# EAGLE board io-board-b-f (EAGLE 8.4.3), part 1 of 2
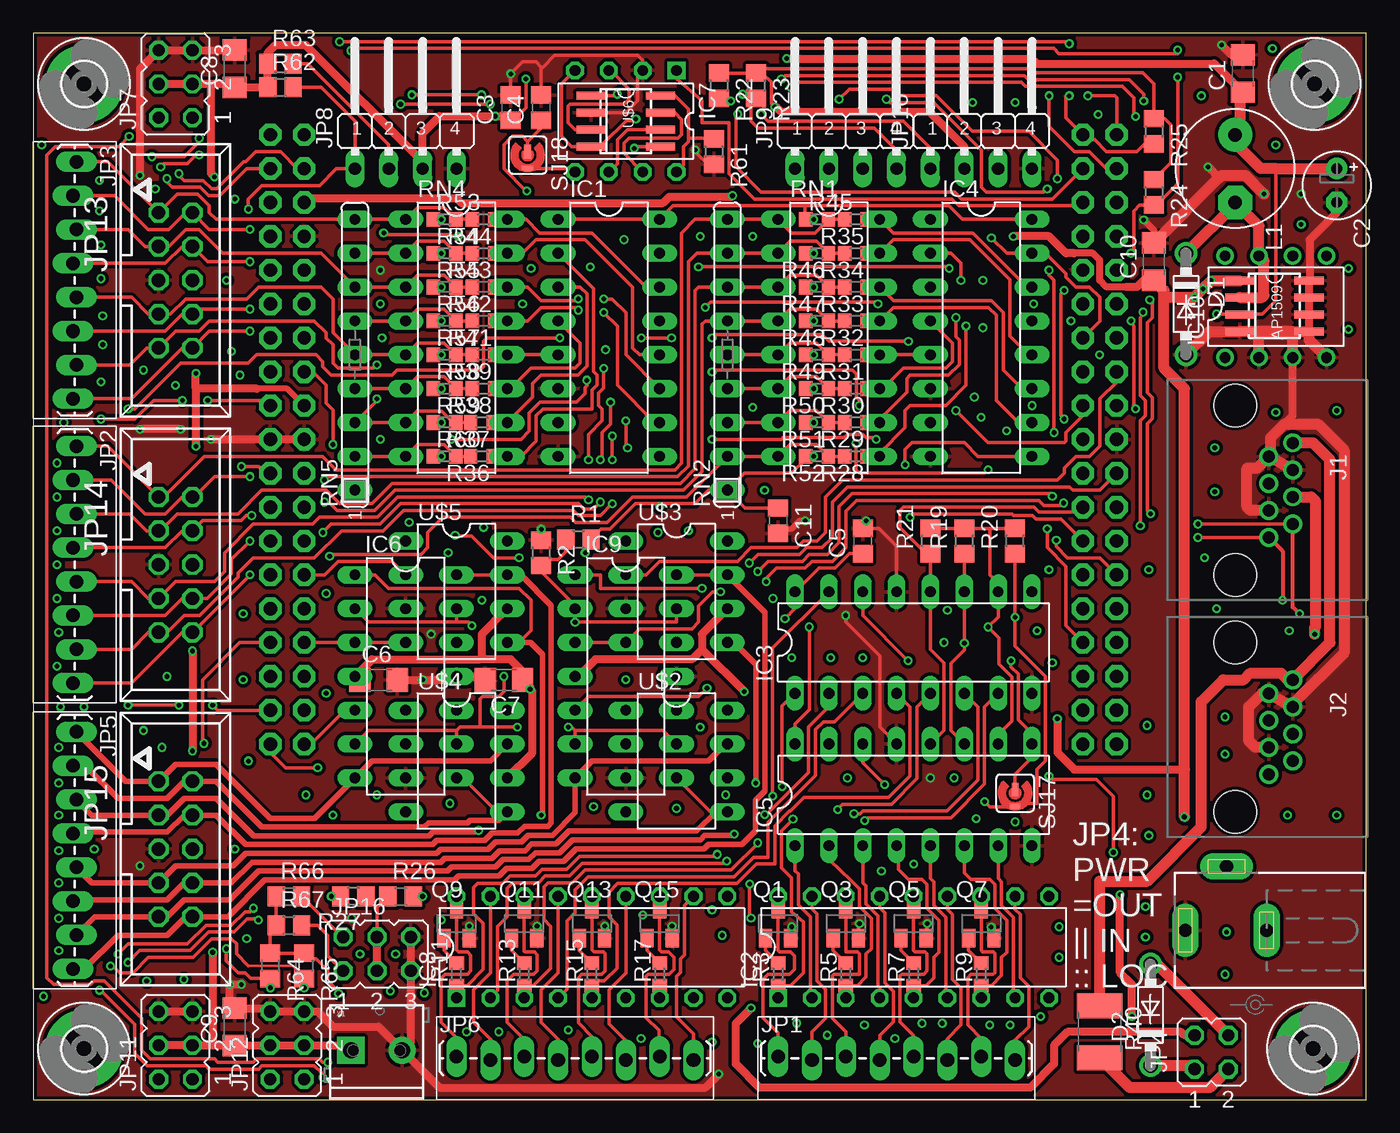
[diagram p0: board, top side]
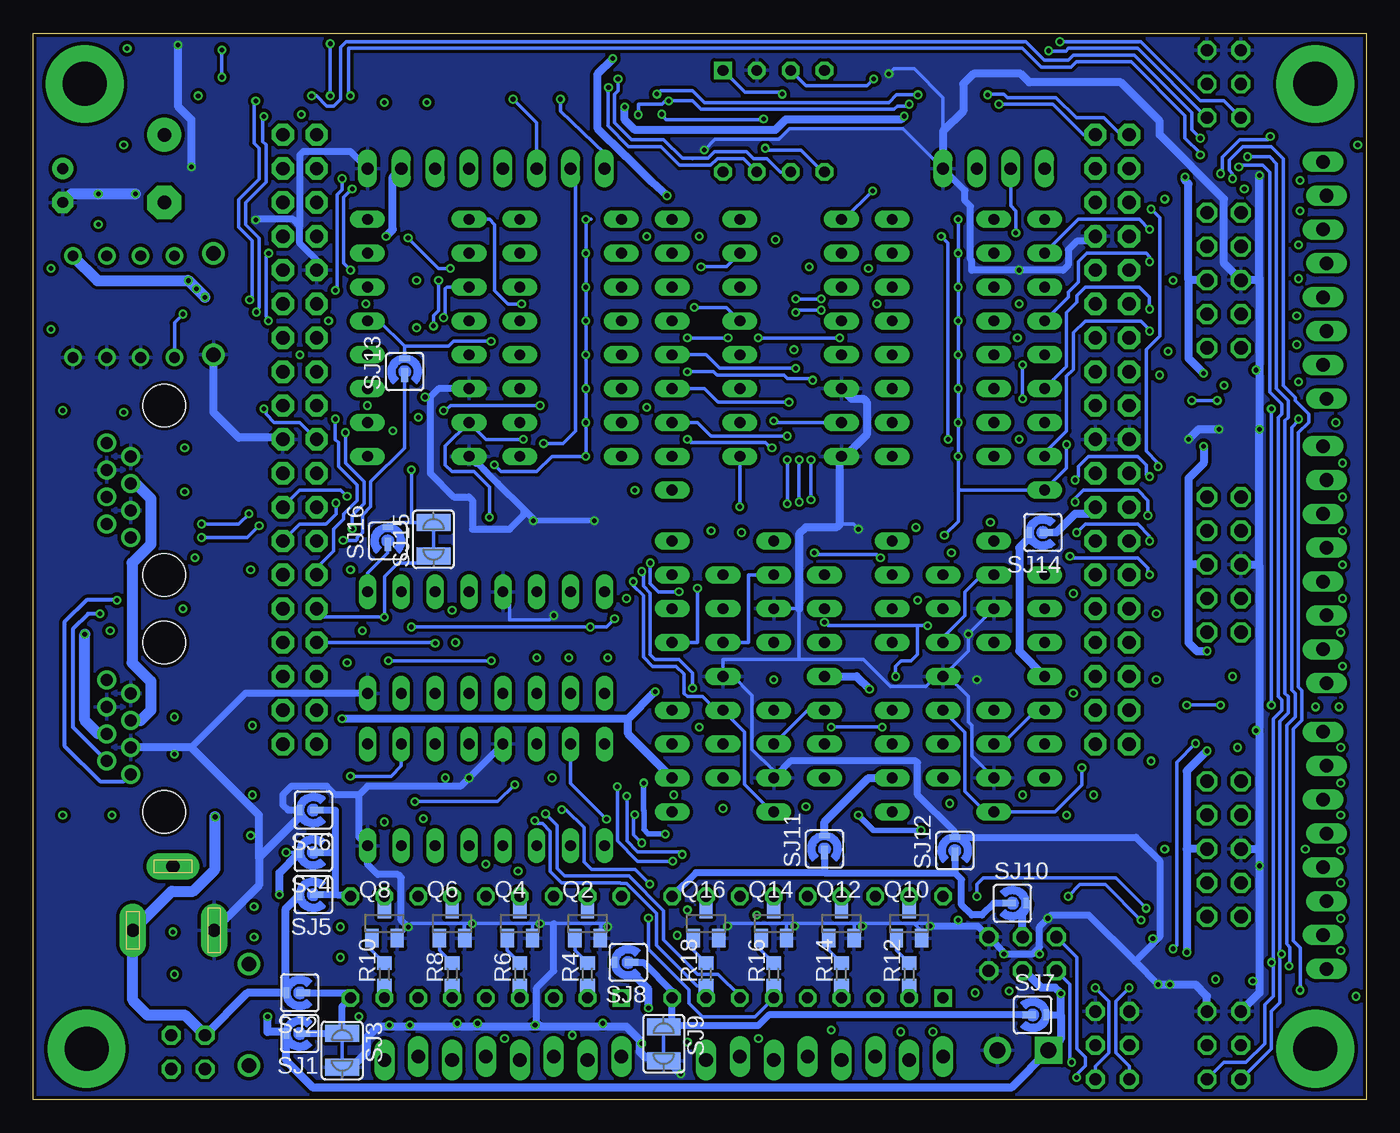
[diagram p1: board, bottom side, seen from below]

Size 100 x 80 mm. Coordinates in mm from the lower left corner, seen from the top.
Outline: 0,0 100,0 100,80 0,80 0,0
Copper layers (1*16): Top 0.035mm / dielectric 1.5mm / Bottom 0.035mm
Design rules "SeeedStudio_2layer_DRU_no_angle_20140221 *": minimum track width 6mil, minimum drill 12mil, track to track 10mil, track to pad 7mil, pad to pad 16mil, via to via 6mil, smd to smd 0mil, copper to edge 10mil, drill to drill 10mil, minimum pad ring 10mil, minimum via ring 6mil, stop-mask expansion 2mil, vias tented up to drill 100mil, thermal gap 10mil

## Footprints (pad centres in the part's own frame; a part is rotated, then mirrored left to right if it is on the bottom)
SO-08 = smd 0.6 x 2.2: 1 -1.905,-2.6; 2 -0.635,-2.6; 3 0.635,-2.6; 4 1.905,-2.6; 5 1.905,2.6; 6 0.635,2.6; 7 -0.635,2.6; 8 -1.905,2.6
C1206 = smd 1.6 x 1.8: 1 -1.4,0; 2 1.4,0
E2,5-5 = drill 0.813 pad 1.6: + -1.27,0 | drill 0.813 pad 1.6 octagon: - 1.27,0
C0805 = smd 1.3 x 1.5: 1 -0.95,0; 2 0.95,0
DO41-7.6 = drill 1.1 pad 1.7: A 3.81,0; C -3.81,0
3,3-PAD = drill 3.3 pad 5.842: B3,3 0,0
DIL16 = drill 0.813 long: 1 -8.89,-3.81; 2 -6.35,-3.81; 3 -3.81,-3.81; 4 -1.27,-3.81; 5 1.27,-3.81; 6 3.81,-3.81; 7 6.35,-3.81; 8 8.89,-3.81; 9 8.89,3.81; 10 6.35,3.81; 11 3.81,3.81; 12 1.27,3.81; 13 -1.27,3.81; 14 -3.81,3.81; 15 -6.35,3.81; 16 -8.89,3.81
DIL18-THIN = drill 0.813 square: 1 -10.16,-3.81 | drill 0.813 octagon: 2 -7.62,-3.81; 3 -5.08,-3.81; 4 -2.54,-3.81; 5 0,-3.81; 6 2.54,-3.81; 7 5.08,-3.81; 8 7.62,-3.81; 9 10.16,-3.81; 10 10.16,3.81; 11 7.62,3.81; 12 5.08,3.81; 13 2.54,3.81; 14 0,3.81; 15 -2.54,3.81; 16 -5.08,3.81; 17 -7.62,3.81; 18 -10.16,3.81
DIL14 = drill 0.813 long: 1 -7.62,-3.81; 2 -5.08,-3.81; 3 -2.54,-3.81; 4 0,-3.81; 5 2.54,-3.81; 6 5.08,-3.81; 7 7.62,-3.81; 8 7.62,3.81; 9 5.08,3.81; 10 2.54,3.81; 11 0,3.81; 12 -2.54,3.81; 13 -5.08,3.81; 14 -7.62,3.81
DIL08 = drill 0.813 square: 1 -3.81,-3.81 | drill 0.813 octagon: 2 -1.27,-3.81; 3 1.27,-3.81; 4 3.81,-3.81; 5 3.81,3.81; 6 1.27,3.81; 7 -1.27,3.81; 8 -3.81,3.81
DIL08' = drill 0.813 pad 1.27: 1 -3.81,-3.81; 2 -1.27,-3.81; 3 1.27,-3.81; 4 3.81,-3.81; 5 3.81,3.81; 6 1.27,3.81; 7 -1.27,3.81; 8 -3.81,3.81
RJ45-PULSE-E5J88 = drill 0.9 pad 1.422: 1 3.555,2.54; 2 2.535,4.32; 3 1.515,2.54; 4 0.495,4.32; 5 -0.495,2.54; 6 -1.515,4.32; 7 -2.535,2.54; 8 -3.555,4.32 | hole 3.2: 6.35,0; -6.35,0
DCJ0202 = drill 1 pad 2 long: 1 0,3.1; 2 4.8,0; 3 0,-3
1X08_TERMINAL = drill 1.016 long: 1 0,0.127; 2 2.54,-0.127; 3 5.08,0.127; 4 7.62,-0.127; 5 10.16,0.127; 6 12.7,-0.127; 7 15.24,0.127; 8 17.78,-0.127
JP2Q = drill 0.914 octagon: 1 -1.27,-1.27; 2 -1.27,1.27; 3 1.27,-1.27; 4 1.27,1.27
JP3Q = drill 0.914 octagon: 1 -2.54,-1.27; 2 -2.54,1.27; 3 0,-1.27; 4 0,1.27; 5 2.54,-1.27; 6 2.54,1.27
JP4F = drill 0.914 long: 1 -2.54,-1.27; 2 0,-1.27; 3 2.54,-1.27; 4 5.08,-1.27
CON10M = drill 1 octagon: 1 -5.08,-1.27; 2 -5.08,1.27; 3 -2.54,-1.27; 4 -2.54,1.27; 5 0,-1.27; 6 0,1.27; 7 2.54,-1.27; 8 2.54,1.27; 9 5.08,-1.27; 10 5.08,1.27
L5-8,5 = drill 1.016 pad 2.54: 1 -2.54,0 | drill 1.016 pad 2.54 octagon: 2 2.54,0
SOT23 = smd 1 x 1.4: 1 -0.95,-1.1; 2 0.95,-1.1; 3 0,1.1
R0805 = smd 1.3 x 1.5: 1 -0.95,0; 2 0.95,0
R0603 = smd 1 x 1.1: 1 -0.85,0; 2 0.85,0
PTC1812 = smd 1.9 x 3.4: 1 -1.95,0; 2 1.95,0
SIL9 = drill 0.813 long: 1 -10.16,0; 2 -7.62,0; 3 -5.08,0; 4 -2.54,0; 5 0,0; 6 2.54,0; 7 5.08,0; 8 7.62,0; 9 10.16,0
SJ_RND2 = smd 1.016 x 0.508: P$1 -0.254,0 | smd 0.406 x 0.813: P$2 1.016,0
SJW-C = smd 1.27 x 2.54: 1 -1.27,0; 2 1.27,0
NUCLEO_BRD_BASE64 = drill 1 pad 1.676 octagon: 3V3 2.54,27.94; 5V2 2.54,25.4; AGND 63.5,7.62; AVDD 60.96,38.1; BOOT0 0,38.1; E5V 2.54,40.64; GND3 0,22.86; GND4 2.54,20.32; GND5 2.54,22.86; GND6 2.54,38.1; GND7 60.96,35.56; GND8 63.5,22.86; IOREF2 2.54,33.02; NC1-PF7 0,33.02; NC2-PF6 0,35.56; NC3 2.54,15.24; NC4 2.54,35.56; NC5-PD8 63.5,35.56; NC6-PB11 63.5,25.4; NC7-PF5 63.5,2.54; NC8-PF4 63.5,0; NRESET 2.54,30.48; PA0 2.54,12.7; PA1 2.54,10.16; PA2 60.96,2.54; PA3 60.96,0; PA4 2.54,7.62; PA5 60.96,33.02; PA6 60.96,30.48; PA7 60.96,27.94; PA8 60.96,17.78; PA9 60.96,20.32; PA10 60.96,5.08; PA11 63.5,30.48; PA12 63.5,33.02; PA13 0,30.48; PA14 0,27.94; PA15 0,25.4; PB0 2.54,5.08; PB1 63.5,17.78; PB2 63.5,20.32; PB3 60.96,7.62; PB4 60.96,12.7; PB5 60.96,10.16; PB6 60.96,25.4; PB7 0,20.32; PB8 60.96,43.18; PB9 60.96,40.64; PB10 60.96,15.24; PB12 63.5,27.94; PB13 63.5,10.16; PB14 63.5,12.7; PB15 63.5,15.24; PC0 2.54,0; PC1 2.54,2.54; PC2 0,2.54; PC3 0,0; PC4 63.5,5.08; PC5 63.5,40.64; PC6 63.5,43.18; PC7 60.96,22.86; PC8 63.5,45.72; PC9 60.96,45.72; PC10 0,45.72; PC11 2.54,45.72; PC12 0,43.18; PC13 0,17.78; PC14 0,15.24; PC15 0,12.7; PD2 2.54,43.18; PF0-PH0 0,10.16; PF1-PH1 0,7.62; U5V 63.5,38.1; VBAT 0,5.08; VDD 0,40.64; VIN2 2.54,17.78
DIL08-LONG = drill 0.813 long: 1 -3.81,-3.81; 2 -1.27,-3.81; 3 1.27,-3.81; 4 3.81,-3.81; 5 3.81,3.81; 6 1.27,3.81; 7 -1.27,3.81; 8 -3.81,3.81
SCREWTERMINAL-3.5MM-2_LOCK = drill 1.2 pad 2.032 square: 1 -0.178,0 | drill 1.2 pad 2.032: 2 3.678,0

## Placement (x,y rotation side)
+12V  9-15V  [POWER_USAGE]  91.69,7.11 270 top
AP1509  AP1509  [SO-08]  93.12,59.54 270 top
C1  [C1206]  90.73,76.99 90 top
C2  [E2,5-5]  97.79,68.58 270 top
C3  [C0805]  35.81,74.42 90 top
C4  [C0805]  38.1,74.42 90 top
C5  [C0805]  62.23,41.91 90 top
C6  [C1206]  25.91,31.5 0 top
C7  [C1206]  35.31,31.5 180 top
C8  [C1206]  15.11,77.34 90 top
C9  [C1206]  15.11,5.46 90 top
C10  [C1206]  84.07,62.87 90 top
C11  [C0805]  55.88,43.43 270 top
D1  [DO41-7.6]  86.49,59.69 270 top
D2  [DO41-7.6]  83.82,6.35 90 top
H1  MOUNT-PAD-ROUND3.3  [3,3-PAD]  3.81,76.2 0 top
H2  MOUNT-PAD-ROUND3.3  [3,3-PAD]  3.81,3.81 0 top
H3  MOUNT-PAD-ROUND3.3  [3,3-PAD]  96.01,3.81 0 top
H4  MOUNT-PAD-ROUND3.3  [3,3-PAD]  96.14,76.2 0 top
IC1  74166N  [DIL16]  43.18,57.15 270 top
IC2  [DIL18-THIN]  66.04,11.43 0 top
IC3  74HCT595N  [DIL16]  66.04,34.29 0 top
IC4  74166N  [DIL16]  71.12,57.15 270 top
IC5  74HCT595N  [DIL16]  66.04,22.86 0 top
IC6  LM324N  [DIL14]  27.94,31.75 270 top
IC7  PCA82C250  [DIL08]  44.45,73.41 180 top
IC8  [DIL18-THIN]  41.91,11.43 0 top
IC9  LM324N  [DIL14]  44.45,31.75 270 top
IC10  LM2574N-5.0  [DIL08']  93.22,59.49 0 top
J1  RJ45-JACKRJ45-PULSE-E5J00  [RJ45-PULSE-E5J88]  90.17,45.72 270 top
J2  RJ45-JACKRJ45-PULSE-E5J00  [RJ45-PULSE-E5J88]  90.17,27.94 270 top
J3  DCJ0202  [DCJ0202]  89.53,12.7 90 top
JP1  M08-SCREW  [1X08_TERMINAL]  55.88,3.1 0 top
JP2  M08-SCREW  [1X08_TERMINAL]  3.1,49.02 270 top
JP3  M08-SCREW  [1X08_TERMINAL]  3.1,70.36 270 top
JP4  [JP2Q]  88.39,3.56 0 top
JP5  M08-SCREW  [1X08_TERMINAL]  3.1,27.58 270 top
JP6  M08-SCREW  [1X08_TERMINAL]  31.75,3.1 0 top
JP7  [JP3Q]  10.67,76.2 90 top
JP8  [JP4F]  26.67,71.12 0 top
JP9  [JP4F]  59.69,71.12 0 top
JP10  [JP4F]  69.85,71.12 0 top
JP11  [JP3Q]  10.67,4.06 90 top
JP12  [JP3Q]  19.05,4.06 90 top
JP13  [CON10M]  10.67,61.47 270 top
JP14  [CON10M]  10.67,40.13 270 top
JP15  [CON10M]  10.67,18.8 270 top
JP16  [JP3Q]  25.78,10.92 0 top
L1  L-US  [L5-8,5]  90.17,69.85 270 top
Q1  [SOT23]  55.88,13.21 0 top
Q2  [SOT23]  58.42,13.21 0 bottom
Q3  [SOT23]  60.96,13.21 0 top
Q4  [SOT23]  63.5,13.21 0 bottom
Q5  [SOT23]  66.04,13.21 0 top
Q6  [SOT23]  68.58,13.21 0 bottom
Q7  [SOT23]  71.12,13.21 0 top
Q8  [SOT23]  73.66,13.21 0 bottom
Q9  [SOT23]  31.75,13.21 0 top
Q10  [SOT23]  34.29,13.21 0 bottom
Q11  [SOT23]  36.83,13.21 0 top
Q12  [SOT23]  39.37,13.21 0 bottom
Q13  [SOT23]  41.91,13.21 0 top
Q14  [SOT23]  44.45,13.21 0 bottom
Q15  [SOT23]  46.99,13.21 0 top
Q16  [SOT23]  49.53,13.21 0 bottom
R1  10k  [R0805]  40.89,42.04 0 top
R2  10k  [R0805]  38.1,41.02 270 top
R3  [R0603]  55.88,9.4 90 top
R4  [R0603]  58.42,9.4 90 bottom
R5  [R0603]  60.96,9.4 90 top
R6  [R0603]  63.5,9.4 90 bottom
R7  [R0603]  66.04,9.4 90 top
R8  [R0603]  68.58,9.4 90 bottom
R9  [R0603]  71.12,9.4 90 top
R10  [R0603]  73.66,9.4 90 bottom
R11  [R0603]  31.75,9.4 90 top
R12  [R0603]  34.29,9.4 90 bottom
R13  [R0603]  36.83,9.4 90 top
R14  [R0603]  39.37,9.4 90 bottom
R15  [R0603]  41.91,9.4 90 top
R16  [R0603]  44.45,9.4 90 bottom
R17  [R0603]  46.99,9.4 90 top
R18  [R0603]  49.53,9.4 90 bottom
R19  [R0805]  69.85,41.91 90 top
R20  [R0805]  73.66,41.91 90 top
R21  [R0805]  67.31,41.91 90 top
R22  [R0805]  51.44,76.07 270 top
R23  [R0805]  54.23,76.07 270 top
R24  [R0805]  84.07,68.07 270 top
R25  [R0805]  84.07,72.64 270 top
R26  [R0805]  27.56,15.24 0 top
R27  [R0805]  24,15.24 180 top
R28  [R0603]  61.72,48.26 180 top
R29  [R0603]  61.72,50.8 180 top
R30  [R0603]  61.72,53.34 180 top
R31  [R0603]  61.72,55.88 180 top
R32  [R0603]  61.72,58.42 180 top
R33  [R0603]  61.72,60.96 180 top
R34  [R0603]  61.72,63.5 180 top
R35  [R0603]  61.72,66.04 180 top
R36  [R0603]  33.66,48.26 180 top
R37  [R0603]  33.66,50.8 180 top
R38  [R0603]  33.78,53.34 180 top
R39  [R0603]  33.78,55.88 180 top
R40  0ZCG0035AF2C  [PTC1812]  80.01,5.08 270 top
R41  [R0603]  33.78,58.42 180 top
R42  [R0603]  33.78,60.96 180 top
R43  [R0603]  33.78,63.5 180 top
R44  [R0603]  33.78,66.04 180 top
R45  [R0603]  58.8,66.04 0 top
R46  [R0603]  58.8,63.5 180 top
R47  [R0603]  58.8,60.96 180 top
R48  [R0603]  58.8,58.42 180 top
R49  [R0603]  58.8,55.88 180 top
R50  [R0603]  58.8,53.34 180 top
R51  [R0603]  58.8,50.8 180 top
R52  [R0603]  58.8,48.26 180 top
R53  [R0603]  30.86,66.04 0 top
R54  [R0603]  30.86,63.5 0 top
R55  [R0603]  30.86,60.96 0 top
R56  [R0603]  30.86,58.42 0 top
R57  [R0603]  30.86,55.88 0 top
R58  [R0603]  30.86,53.34 0 top
R59  [R0603]  30.86,50.8 0 top
R60  [R0603]  30.86,48.26 0 top
R61  [R0805]  51.05,71.12 270 top
R62  [R0805]  18.54,75.95 0 top
R63  [R0805]  18.54,77.72 0 top
R64  [R0805]  17.78,10.03 270 top
R65  [R0805]  20.32,10.03 270 top
R66  [R0805]  19.18,15.24 0 top
R67  [R0805]  19.18,13.08 0 top
RN1  [DIL16]  59.69,57.15 270 top
RN2  10K  [SIL9]  52.07,55.88 90 top
RN4  [DIL16]  31.75,57.15 270 top
RN5  10K  [SIL9]  24.13,55.88 90 top
SJ1  [SJ_RND2]  80.01,4.95 180 bottom
SJ2  [SJ_RND2]  80.01,8 180 bottom
SJ3  [SJW-C]  76.83,3.68 270 bottom
SJ4  [SJ_RND2]  78.99,18.54 180 bottom
SJ5  [SJ_RND2]  78.99,15.37 180 bottom
SJ6  [SJ_RND2]  78.99,21.72 180 bottom
SJ7  [SJ_RND2]  25.02,6.35 0 bottom
SJ8  [SJ_RND2]  55.37,10.29 180 bottom
SJ9  [SJW-C]  52.7,4.19 270 bottom
SJ10  [SJ_RND2]  26.54,14.73 0 bottom
SJ11  [SJ_RND2]  40.64,18.8 90 bottom
SJ12  [SJ_RND2]  30.86,18.67 90 bottom
SJ13  [SJ_RND2]  72.14,54.61 90 bottom
SJ14  [SJ_RND2]  24.26,42.55 180 bottom
SJ15  [SJW-C]  69.98,42.04 90 bottom
SJ16  [SJ_RND2]  73.41,41.91 90 bottom
SJ17  [SJ_RND2]  73.66,22.99 270 top
SJ18  [SJ_RND2]  37.08,70.87 270 top
U$1  NUCLEO_64_GENERIC  [NUCLEO_BRD_BASE64]  17.78,26.67 0 top
U$2  TC4426APDIP  [DIL08-LONG]  48.26,25.4 270 top
U$3  TC4426APDIP  [DIL08-LONG]  48.26,38.1 270 top
U$4  TC4426APDIP  [DIL08-LONG]  31.75,25.4 270 top
U$5  TC4426APDIP  [DIL08-LONG]  31.75,38.1 270 top
U$6  MCP2551-SN  [SO-08]  44.45,73.41 270 top
X1  [SCREWTERMINAL-3.5MM-2_LOCK]  24,3.68 0 top

## Library data of the parts
+12V U$6 X1 = SPCoast
AP1509 IC2 IC8 J1 J2 JP1-JP3 JP5 JP6 JP8-JP10 JP13-JP15 L1 SJ1-SJ18 U$1-U$5 = trainlib
C1-C11 R1-R39 R41-R67 = rcl
D1 D2 = diode
H1-H4 = holes
IC1 IC4 = 74xx-us
IC3 IC5 = 74xx-eu
IC6 IC9 IC10 = linear
IC7 = trainlib; OC_FARNELL: 3692358; OC_NEWARK: unknown
J3 = con-jack; OC_FARNELL: unknown; OC_NEWARK: unknown
JP4 JP7 JP11 JP12 JP16 = jumper
Q1-Q16 = transistor-small-signal
R40 = tcs
RN1 RN4 = resistor-dil; OC_FARNELL: unknown; OC_NEWARK: unknown
RN2 RN5 = resistor-sil; OC_FARNELL: unknown; OC_NEWARK: unknown

## Nets
+3.3V: C4.1 C11.1 IC1.1 IC1.9 IC1.16 IC4.9 IC4.16 R1.2 R45.1 R46.2 R47.2 R48.2 R49.2 R50.2 R51.2 R52.2 R53.1 R54.1 R55.1 R56.1 R57.1 R58.1 R59.1 R60.1 RN2.1 RN5.1 SJ18.P$1 U$1.3V3
+5V: C3.1 C5.1 C8.1 C9.1 IC3.10 IC3.16 IC5.10 IC5.16 IC7.3 JP7.3 JP7.4 JP8.3 JP10.2 JP11.3 JP11.4 JP12.3 JP12.4 JP13.6 JP14.6 JP15.6 JP16.3 JP16.4 R19.2 R20.2 R21.2 R22.1 R23.1 R24.1 R25.1 R26.1 R27.1 R62.1 R63.1 R64.1 R65.1 R66.1 R67.1 SJ1.P$2 SJ4.P$2 SJ7.P$2 SJ10.P$2 U$1.5V2 U$6.3 X1.1
+12V: AP1509.1 C6.1 C7.1 C10.1 IC6.4 IC9.4 IC10.5 J3.3 JP4.2 JP10.3 SJ2.P$2 SJ5.P$2 SJ8.P$2 SJ11.P$2 SJ14.P$2 U$2.6 U$3.6 U$4.6 U$5.6
AGND: U$1.AGND
AVDD: U$1.AVDD
CAN_RS: IC7.8 R61.1 U$6.8
CAN_VIO: IC7.5 SJ18.P$2 U$6.5
CANH: IC7.7 J1.1 J2.1 U$6.7
CANL: IC7.6 J1.2 J2.2 U$6.6
CANRX: IC7.4 U$1.PB8 U$6.4
CANTX: IC7.1 U$1.PB9 U$6.1
CMPREF: IC6.2 IC6.6 IC6.9 IC6.13 IC9.2 IC9.6 IC9.9 IC9.13 R1.1 R2.2
E_CS: JP9.4 R23.2 U$1.PC10
E_LAT: JP10.1 R22.2 U$1.PC11
E_MOSI: JP9.2 SJ15.2 SJ16.P$2
GND: AP1509.4 AP1509.5 AP1509.6 AP1509.7 AP1509.8 C1.2 C2.- C3.2 C4.2 C5.2 C6.2 C7.2 C8.2 C9.2 C10.2 C11.2 D1.A IC1.6 IC1.8 IC3.8 IC3.13 IC4.6 IC4.8 IC5.8 IC5.13 IC6.11 IC7.2 IC9.11 IC10.2 IC10.3 IC10.4 J1.3 J1.6 J1.7 J2.3 J2.6 J2.7 J3.1 JP7.5 JP7.6 JP8.4 JP10.4 JP11.5 JP11.6 JP12.5 JP12.6 JP13.5 JP14.5 JP15.5 JP16.5 JP16.6 Q1.2 Q2.2 Q3.2 Q4.2 Q5.2 Q6.2 Q7.2 Q8.2 Q9.2 Q10.2 Q11.2 Q12.2 Q13.2 Q14.2 Q15.2 Q16.2 R2.1 R61.2 SJ3.2 SJ6.P$2 SJ9.2 SJ12.P$2 U$1.GND3 U$1.GND5 U$1.GND6 U$1.GND7 U$1.GND8 U$2.3 U$3.3 U$4.3 U$5.3 U$6.2 X1.2
GND4: U$1.GND4
I2CSCL: JP8.2 R63.2 U$1.PB6
I2CSDA: JP8.1 R62.2 U$1.PB7
ILAT: IC1.15 IC4.15 U$1.PA6
LPOWA: IC8.9 SJ7.P$1 SJ8.P$1 SJ9.1
LPOWB: IC8.10 SJ10.P$1 SJ11.P$1 SJ12.P$1
MISO: JP9.1 U$1.PB4
MISO2: IC4.13 SJ13.P$2 U$1.PC2
MISO2_ALT: SJ13.P$1 U$1.PB14
MOSI: IC5.14 R20.1 SJ15.1 SJ17.P$2 U$1.PB5
N$1: IC2.1 IC5.15 R3.1
N$2: IC2.18 JP1.1 Q1.3
N$3: IC2.2 IC5.1 R4.1
N$4: J1.4 J2.4
N$5: J1.5 J2.5
N$6: JP3.8 JP13.10 R36.2 R60.2 RN4.8 RN5.2
N$7: IC2.17 JP1.2 Q2.3
N$8: IC2.3 IC5.2 R5.1
N$9: IC2.16 JP1.3 Q3.3
N$10: IC2.4 IC5.3 R6.1
N$11: IC2.15 JP1.4 Q4.3
N$12: IC2.5 IC5.4 R7.1
N$13: IC2.14 JP1.5 Q5.3
N$14: JP3.7 JP13.9 R37.2 R59.2 RN4.7 RN5.3
N$15: JP3.6 JP13.8 R38.2 R58.2 RN4.6 RN5.4
N$16: Q4.1 R6.2
N$17: IC2.6 IC5.5 R8.1
N$18: IC2.13 JP1.6 Q6.3
N$19: JP3.4 JP13.4 R41.2 R56.2 RN4.4 RN5.6
N$20: JP3.3 JP13.3 R42.2 R55.2 RN4.3 RN5.7
N$21: JP2.6 JP14.8 R30.2 R50.1 RN1.6 RN2.4
N$22: JP3.1 JP13.1 R44.2 R53.2 RN4.1 RN5.9
N$23: IC1.2 R36.1 RN4.9
N$24: IC1.3 R37.1 RN4.10
N$25: JP2.8 JP14.10 R28.2 R52.1 RN1.8 RN2.2
N$26: JP2.7 JP14.9 R29.2 R51.1 RN1.7 RN2.3
N$27: Q5.1 R7.2
N$28: JP2.5 JP14.7 R31.2 R49.1 RN1.5 RN2.5
N$29: IC1.4 R38.1 RN4.11
N$30: IC1.5 R39.1 RN4.12
N$31: IC1.10 R41.1 RN4.13
N$32: IC1.11 R42.1 RN4.14
N$33: JP2.4 JP14.4 R32.2 R48.1 RN1.4 RN2.6
N$34: JP2.3 JP14.3 R33.2 R47.1 RN1.3 RN2.7
N$35: JP2.2 JP14.2 R34.2 R46.1 RN1.2 RN2.8
N$36: JP2.1 JP14.1 R35.2 R45.2 RN1.1 RN2.9
N$37: IC1.12 R43.1 RN4.15
N$38: IC1.14 R44.1 RN4.16
N$39: IC2.7 IC5.6 R9.1
N$40: IC2.12 JP1.7 Q7.3
N$41: IC2.8 IC5.7 R10.1
N$42: IC2.11 JP1.8 Q8.3
N$43: Q6.1 R8.2
N$44: IC4.2 R28.1 RN1.9
N$45: D2.C JP4.1
N$46: D2.A JP4.4
N$47: IC4.3 R29.1 RN1.10
N$48: IC4.4 R30.1 RN1.11
N$49: IC4.5 R31.1 RN1.12
N$50: IC4.10 R32.1 RN1.13
N$51: IC4.11 R33.1 RN1.14
N$52: IC4.12 R34.1 RN1.15
N$53: IC4.14 R35.1 RN1.16
N$56: IC3.15 IC8.1 R11.1
N$57: JP4.3 R40.2
N$60: SJ14.P$1 U$1.VIN2
N$65: Q7.1 R9.2
N$75: IC8.11 JP6.8 Q16.3
N$78: Q1.1 R3.2
N$79: Q2.1 R4.2
N$83: JP3.5 JP13.7 R39.2 R57.2 RN4.5 RN5.5
N$84: JP3.2 JP13.2 R43.2 R54.2 RN4.2 RN5.8
N$85: Q8.1 R10.2
N$87: IC8.18 JP6.1 Q9.3
N$88: Q3.1 R5.2
N$89: IC3.1 IC8.2 R12.1
N$91: IC8.17 JP6.2 Q10.3
N$92: IC3.2 IC8.3 R13.1
N$93: IC8.16 JP6.3 Q11.3
N$94: IC3.3 IC8.4 R14.1
N$95: IC8.15 JP6.4 Q12.3
N$96: IC3.4 IC8.5 R15.1
N$97: IC8.14 JP6.5 Q13.3
N$98: IC3.5 IC8.6 R16.1
N$99: IC8.13 JP6.6 Q14.3
N$100: IC3.6 IC8.7 R17.1
N$101: IC8.12 JP6.7 Q15.3
N$102: IC3.7 IC8.8 R18.1
N$104: Q9.1 R11.2
N$105: Q10.1 R12.2
N$106: Q11.1 R13.2
N$107: Q12.1 R14.2
N$108: Q13.1 R15.2
N$109: Q14.1 R16.2
N$110: Q15.1 R17.2
N$111: Q16.1 R18.2
OLAT: IC3.12 IC5.12 R21.1 U$1.PA8
PWR_POS: J1.8 J2.8 R40.1
RPOWA: IC2.9 SJ1.P$1 SJ2.P$1 SJ3.1
RPOWB: IC2.10 SJ4.P$1 SJ5.P$1 SJ6.P$1
SCK: IC3.11 IC5.11 JP9.3 R19.1 U$1.PB3
SCK2: IC1.7 IC4.7 U$1.PB10
SLNK1: IC3.14 IC5.9 SJ17.P$1
SLNK2: IC3.9 SJ16.P$1
SLNK3: IC1.13 IC4.1
SRV1: JP7.2 R25.2 U$1.PC9
SRV2: JP7.1 R24.2 U$1.PC7
SRV3: JP11.2 R26.2 U$1.PC8
SRV4: JP11.1 R27.2 U$1.PC6
SRV5: JP12.2 R64.2 U$1.PF1-PH1
SRV6: JP12.1 R65.2 U$1.PA15
SRV7: JP16.2 R66.2 U$1.PC12
SRV8: JP16.1 R67.2 U$1.PD2
SW: AP1509.2 D1.C IC10.7 L1.2
TIN1: IC9.3 U$1.PB2 U$3.4
TIN2: IC9.5 U$1.PB1 U$2.2
TIN3: IC9.10 U$1.PB15 U$2.4
TIN4: IC9.12 U$1.PB12 U$3.2
TIN5: IC6.3 U$1.PA4 U$5.4
TIN6: IC6.5 U$1.PC0 U$4.2
TIN7: IC6.10 U$1.PC3 U$4.4
TIN8: IC6.12 U$1.PA0 U$5.2
TOUT1: IC6.7 JP5.1 JP15.1 U$4.7
TOUT2: IC6.8 JP5.2 JP15.2 U$4.5
TOUT3: IC6.1 JP5.3 JP15.3 U$5.5
TOUT4: IC6.14 JP5.4 JP15.4 U$5.7
TOUT5: IC9.7 JP5.5 JP15.7 U$2.7
TOUT6: IC9.8 JP5.6 JP15.8 U$2.5
TOUT7: IC9.1 JP5.7 JP15.9 U$3.5
TOUT8: IC9.14 JP5.8 JP15.10 U$3.7
U5V: U$1.U5V
V+: AP1509.3 C1.1 C2.+ IC10.1 L1.1 U$1.E5V
VBAT: U$1.VBAT
VDD: U$1.VDD

## Tracks (layer width: path | path; a pad name or v marks a point on that pad's centre or on a via)
+3.3V  (via drill 0.35)
  Top 0.254: U$1.3V3 20.95,54.61 21.97,53.59 21.97,52.24 22.48,51.73 v22.48,49.15 | v58.55,66.04 R45.1 57.91,66.08 57.91,67.06 | v58.55,63.5 R46.2 | v58.55,60.96 R47.2 | R48.2 v58.55,58.42 | v58.55,55.88 R49.2 | v58.55,53.34 R50.2 | v58.55,50.8 R51.2 | v58.55,48.26 R52.2 57.95,48.05 56.9,46.99 53.34,46.99 RN2.1 | R53.1 v30.61,66.04 | v30.61,48.26 R60.1 | R59.1 v30.6,50.8 | R58.1 v30.61,53.34 | R57.1 v30.61,55.88 | R56.1 v30.61,58.42 | R55.1 v30.61,60.96 | R54.1 v30.61,63.5 | 46.99,44.7 45.17,44.7 43.26,42.8 42.61,42.8 R1.2 41.4,41.59 v41.4,41.02 | 46.99,44.7 49.66,44.7 50.67,45.72 RN2.1 | v36.45,40.64 34.54,40.64 32.89,42.29 31.7,42.29 v31.65,42.34 | IC4.16 69.72,66.04 68.71,67.06 57.91,67.06 | 57.91,67.06 48.01,67.06 IC1.16 IC1.1 | 37.08,71.88 SJ18.P$1 | 37.08,71.88 38.1,72.9 C4.1 | v65.41,47.62 65.41,48.77 65.91,49.28 69.85,49.28 70.87,48.26 IC4.9 | v37.03,68.17 36.98,68.17 35.31,69.85 35.31,71.63 35.94,72.26 36.7,72.26 37.08,71.88 | v46.99,44.48 46.99,44.7 | C11.1 53.41,44.38 RN2.1
  Bottom 0.254: v22.48,49.15 22.48,47.37 RN5.1 30.61,45.72 | v30.61,50.8 v30.61,53.34 v30.61,55.88 v30.61,58.42 v30.61,60.96 v30.61,63.5 v30.61,66.04 | v30.61,50.8 v30.61,48.26 30.61,45.72 | v30.6,50.8 v30.61,50.8 | v41.4,41.02 41.27,40.89 36.7,40.89 v36.45,40.64 | v31.65,42.34 30.61,43.38 30.61,45.72 | 58.17,66.04 v58.55,66.04 v58.55,63.5 v58.55,60.96 v58.55,58.42 v58.55,55.88 v58.55,53.34 v58.55,50.8 v58.55,48.26 61.09,48.26 62.23,47.12 64.9,47.12 v65.41,47.62 | IC1.1 39.17,66.04 v37.03,68.17 | IC1.9 v46.99,44.48
+5V  (via drill 0.35)
  Top 0.254: v56.39,36.07 57.15,36.83 IC3.16 58.93,39.88 60.15,39.88 61.24,40.96 C5.1 | IC5.10 72.54,26.82 72.54,27.53 73.15,28.14 73.15,28.15 73.41,28.4 73.41,31.7 72.44,32.67 72.44,34.64 v71.63,35.46 72.39,36.22 IC3.10 72.39,38.73 71.75,39.37 71.75,42.86 | IC5.16 57.15,28.19 58.22,29.26 v58.22,35.46 | 71.75,42.86 R19.2 R21.2 | 71.75,42.86 R20.2 | U$6.3 40.64,72.77 40.13,73.28 40.13,74.55 40.26,74.68 44.32,74.68 44.7,75.06 44.7,75.82 43.31,77.22 IC7.3 | C8.1 15.5,76.33 | 36.96,76.33 v36.96,76.58 36.96,74.42 36.01,73.47 C3.1 | v55.63,74.47 55.37,74.73 55.37,76.33 54.68,77.02 R23.1 | R22.1 R23.1 | R23.1 54.55,77.34 74.55,77.34 74.85,77.04 83.24,77.04 84.07,76.2 R25.1 84.9,73.59 85.34,73.15 85.34,70.29 R24.1 | JP16.4 25.78,14.41 | R67.1 17.78,12.63 R64.1 R65.1 20.76,10.54 21.21,10.54 22.1,9.65 22.1,8.89 22.91,8.08 v22.91,7.95 | R67.1 18.23,13.68 | R66.1 R67.1 | 25.78,14.41 R27.1 | 25.78,14.41 R26.1 | v81.03,18.54 81.03,22.73 79.76,24 76.45,24 v76.2,24.26
  Top 0.457: U$1.5V2 19.05,53.34 16.76,53.34
  Top 0.61: 16.76,53.34 12.19,53.34 | 12.19,53.34 v12.19,49.02 | v11.94,33.66 v11.94,26.16 | JP11.4 JP11.3 13.46,4.06 | v13.46,11.05 13.46,4.06 | 13.46,4.06 C9.1 JP12.4 JP12.3 23.44,4.06 X1.1 | 12.19,53.34 v12.19,54.48 | v13.59,69.22 13.34,69.47 13.34,76.2 | 13.34,76.2 JP7.3 JP7.4 | 13.34,76.2 14.85,76.2 C8.1 R62.1 R63.1 17.59,78.55 18.16,79.12 20.45,79.12 29.08,70.48 29.08,69.98 JP8.3 29.21,72.52 30.48,73.79 v34.67,73.79 35.5,73.79 C3.1 | JP10.2 69.85,71.5 67.26,74.09 56.13,74.09 55.75,74.47 v55.63,74.47 | JP16.3 JP16.4 | v82.42,6.22 82.42,8.64 81.53,9.53 v81.53,15.37
  Bottom 0.254: v56.39,36.07 57,35.46 v58.22,35.46 v71.63,35.46 | IC7.3 42.04,76.07 37.47,76.07 v36.96,76.58 | v76.2,24.26 73.15,24.26 72.39,25.02 IC5.10 | SJ1.P$2 81.1,4.88 | v81.03,18.54 SJ4.P$2 80.08,18.47 80.09,18.47
  Bottom 0.508: SJ7.P$2 22.91,6.35 | SJ10.P$2 25.45,14.66
  Bottom 0.61: v12.19,49.02 12.19,47.75 13.34,46.61 13.34,40.13 | JP14.6 13.34,40.13 | v11.94,33.66 12.7,33.66 13.34,34.29 13.34,40.13 | v11.94,26.16 13.46,24.64 13.46,18.8 | JP15.6 13.46,18.8 | 13.46,18.8 v13.46,11.05 | v12.19,54.48 13.34,55.63 13.34,61.47 | 13.34,61.47 13.34,68.71 13.59,68.96 v13.59,69.22 | JP13.6 13.34,61.47 | v34.67,73.79 34.92,73.53 43.56,73.53 44.35,72.75 54.84,72.75 55.63,73.53 v55.63,74.47 | JP16.3 25.65,9.65 24.38,8.38 23.34,8.38 v22.91,7.95 22.91,6.35 22.91,4.52 23.75,3.68 X1.1 26.62,0.89 78.99,0.89 81.03,2.92 81.03,4.58 81.06,4.63 81.04,4.71 81.09,4.77 81.08,4.83 81.1,4.88 81.07,4.95 | SJ1.P$2 81.15,5.08 82.42,5.08 v82.42,6.22 | v81.53,15.37 81.53,17.02 80.09,18.47 80.05,18.54 | JP16.4 25.78,13.96 25.76,13.97 25.74,14.04 25.66,14.08 25.64,14.13 25.6,14.17 25.6,14.25 25.54,14.3 25.53,14.36 25.5,14.4 25.51,14.48 25.46,14.55 25.47,14.61 25.45,14.66 25.48,14.73
+12V  (via drill 0.35)
  Top 0.508: 82.04,60.96 80.52,60.96 80.01,61.47 80.01,62.99 79.5,63.5 78.11,63.5 | IC6.4 24.38,31.5 C6.1
  Top 0.61: U$3.6 50.16,34.92 50.16,33.78 | 50.16,33.78 49.4,33.02 42.16,33.02 40.89,31.75 IC9.4 | 50.16,33.78 v53.34,30.61 | v76.83,28.57 76.83,26.04 78.11,24.77 86.36,24.77 | U$4.6 37.44,26.01 37.44,30.63 v37.27,30.8 37.27,30.93 C7.1 36.71,32.13 35.81,33.02 33.53,33.02 | U$5.6 33.66,34.92 33.66,33.27 33.72,33.21 33.53,33.02 | IC6.4 25.4,33.02 33.53,33.02 | C10.1 83.31,61.47 82.8,60.96 82.04,60.96 | v73.53,64.77 76.2,64.77 77.47,63.5 78.11,63.5 | JP4.2 86.36,4.83 86.11,5.08 77.6,5.08 76.58,4.06 76.58,2.67 74.8,0.89 54.48,0.89 52.7,2.67 52.7,5.71 v53.85,6.86
  Top 0.813: v86.36,21.21 86.36,24.77 86.36,53.34 84.84,54.86 84.84,60.2 | AP1509.1 v88.37,61.44 v87.76,60.83 v87.12,60.2 84.84,60.2 | 84.84,60.2 84.84,60.7 C10.1
  Bottom 0.254: SJ2.P$2 81.07,8 | SJ5.P$2 80.08,15.29 80.09,15.29
  Bottom 0.508: 54.9,9.31 55.09,9.31 55.12,9.28 55.17,9.28 55.22,9.26 55.28,9.28 55.29,9.28 55.31,9.28 55.37,9.25 55.41,9.26 55.46,9.25 55.49,9.27 55.61,9.27 55.65,9.3 55.7,9.3 55.74,9.34 55.77,9.36 55.84,9.36 55.87,9.39 55.92,9.4 55.94,9.43 56.04,9.49 56.07,9.53 56.11,9.55 56.18,9.66 56.21,9.67 56.23,9.72 56.26,9.75 56.26,9.82 56.28,9.85 56.33,9.88 56.34,9.93 56.36,9.97 56.35,10.04 56.36,10.07 56.4,10.12 56.39,10.17 56.41,10.21 56.39,10.25 SJ8.P$2
  Bottom 0.61: 55.37,28.57 v53.34,30.61 | 55.37,28.57 v76.83,28.57 | U$2.6 55.37,27.43 55.37,28.57 | IC9.4 38.23,31.75 v37.27,30.8 | SJ14.P$2 25.27,42.16 26.04,41.4 26.04,33.66 IC6.4 | v73.53,64.77 73.03,65.28 73.03,69.22 JP10.3 | v53.85,6.86 53.85,8.26 54.9,9.31 | JP4.2 83.95,8 81.07,8 81.1,8.07 81.08,8.13 81.09,8.18 81.07,8.21 81.07,14.31 80.09,15.29 80.05,15.37 | SJ11.P$2 40.64,20.83 37.34,24.13 U$4.6
  Bottom 0.813: JP4.2 88.65,6.35 91.44,6.35 92.53,7.45 J3.3 89.61,15.62 88.01,15.62 86.36,17.27 v86.36,21.21 | IC10.5 95.17,61.44 v88.37,61.44 | 88.39,61.47 v87.12,60.2
CAN_RS
  Top 0.254: U$6.8 48.13,75.31 49.15,74.3 49.15,72.14 | IC7.8 48.77,70.1 48.77,71.5 49.15,71.88 49.15,72.14 | R61.1 50.99,72.14 49.15,72.14
CAN_VIO  (via drill 0.35)
  Top 0.254: U$6.5 45.21,71.5 v45.09,71.37 | SJ18.P$2 40.13,69.85 40.39,69.6 IC7.5
  Bottom 0.254: v45.09,71.37 44.96,71.37 44.83,71.25 42.42,71.25 40.77,69.6 IC7.5
CANH  (via drill 0.35)
  Top 0.254: U$6.7 48.13,74.04 48.64,73.53 48.64,72.39 48.39,72.14 44.7,72.14 44.32,71.75 44.32,70.99 IC7.7 | v56.85,75.95 57.23,76.33 74.13,76.33 74.43,76.02 81.71,76.02 82.55,75.18 82.55,73.86 v82.7,73.76 | v83.26,59.08 83.26,58.88 83.06,58.67 83.06,52.83 83.44,52.45 83.44,51.31 83.06,50.93 v83.06,43.05 | J1.1 v87.38,42.16
  Top 0.305: J1.1 93.73,41.15 v93.73,37.47
  Bottom 0.254: IC7.7 46.74,70.61 48.68,70.61 49.19,70.1 51.52,70.1 52.91,71.5 55.33,71.5 56.9,73.07 56.9,75.65 56.85,75.69 v56.85,75.95 | v82.7,73.76 82.8,73.66 82.8,71.88 82.55,71.63 82.55,68.83 84.07,67.31 84.07,65.66 83.06,64.64 83.06,59.44 83.14,59.36 83.14,59.08 v83.26,59.08 | v87.38,42.16 83.95,42.16 v83.06,43.05
  Bottom 0.305: v93.73,37.47 96.01,37.47 97.66,35.81 97.66,26.54 95,23.88 93.22,23.88 J2.1
CANL  (via drill 0.35)
  Top 0.254: U$6.6 44.58,72.77 43.81,72.01 43.81,70.23 IC7.6 | v56.13,76.58 56.39,76.83 74.34,76.83 74.64,76.53 82.22,76.53 83.31,75.44 v83.31,74.93 | v83.77,59.99 83.95,59.82 83.95,58.67 83.57,58.29 83.57,53.04 83.95,52.66 83.95,51.1 83.57,50.72 83.57,44.2 v83.82,43.94 | J1.2 v87.38,43.19 v87.38,43.18
  Top 0.305: J1.2 94.49,36.95 v95,36.45
  Bottom 0.254: IC7.6 43.94,69.6 44.96,70.61 45.97,70.61 46.48,71.12 48.89,71.12 49.4,70.61 50.54,70.61 | 50.55,70.61 50.54,70.61 | 50.54,70.61 51.31,70.61 52.7,72.01 55.12,72.01 56.39,73.28 56.39,75.44 56.13,75.69 v56.13,76.58 | v83.31,74.93 83.44,74.8 83.44,71.75 83.06,71.37 83.06,69.04 84.58,67.52 84.58,65.45 83.57,64.43 83.57,60.2 v83.77,59.99 | v87.38,43.18 84.58,43.18 v83.82,43.94
  Bottom 0.305: v95,36.45 95.89,36.45 97.03,35.31 97.03,27.94 J2.2
CANRX  (via drill 0.35)
  Top 0.254: U$6.4 40.39,71.5 39.62,72.26 39.62,76.2 IC7.4 | U$1.PB8 76.45,67.56 69.64,67.56 69.13,68.07 54.61,68.07 52.7,69.98 52.7,73.79 v52.86,73.94 | U$6.4 42.67,71.5 | U$6.4 42.8,71.5 42.8,71.75 44.5,73.46 45.14,73.46 45.21,73.53 v45.21,73.58
  Bottom 0.254: v45.21,73.58 45.29,73.53 52.52,73.53 v52.86,73.94
CANTX  (via drill 0.35)
  Top 0.254: U$6.1 43.69,75.31 v43.81,75.44 | U$1.PB9 78.49,67.06 69.42,67.06 68.92,67.56 54.1,67.56 52.2,69.47 52.2,73.28 50.16,73.28 50.16,74.93 48.26,76.58 IC7.1
  Bottom 0.254: v43.81,75.44 43.94,75.56 46.61,75.56 IC7.1
CMPREF  (via drill 0.35)
  Top 0.254: IC9.13 48.26,35.81 v40.64,35.81 IC9.2 40.64,37.08 38.1,39.62 R2.2 38.54,40.51 39.37,40.51 39.94,41.09 R1.1 | IC9.9 47.24,27.69 40.64,27.69 | 40.64,27.69 IC9.6 | IC6.2 25.15,35.81 31.75,35.81 | IC6.13 31.75,35.81 | IC6.6 25.15,27.69 31.75,27.69 | IC6.9 31.75,27.69 | 31.75,35.81 32.64,35.81 v32.89,35.56 | 31.75,27.69 32,27.94 33.53,27.94 | 33.53,27.94 v36.32,27.94 | v40.13,27.94 40.39,27.94 40.64,27.69 | 33.53,27.94 33.53,30.05 33.71,30.23 34.92,30.23 35.31,30.61 v35.31,31.75
  Bottom 0.254: 33.66,35.56 v32.89,35.56 | 33.66,35.56 40.39,35.56 v40.64,35.81 | v36.32,27.94 v40.13,27.94 | 33.66,35.56 33.68,35.53 33.66,35.51 33.66,33.4 34.16,32.89 34.92,32.89 35.31,32.51 v35.31,31.75
E_CS  (via drill 0.35)
  Top 0.254: v28.4,75.39 v33.63,75.39 | v53.21,75.44 53.91,75.44 R23.2 53.85,74.74 53.85,73.41 54.36,72.9 55.12,72.9 55.24,72.9 63.12,72.9 64.77,71.25 JP9.4
  Bottom 0.254: U$1.PC10 18.41,72.39 19.68,73.66 21.76,73.66 23.29,75.18 26.92,75.18 27.18,75.44 28.35,75.44 v28.4,75.39 | v33.63,75.39 35.23,75.39 35.81,74.8 49.66,74.8 50.55,75.69 52.96,75.69 v53.21,75.44
E_LAT  (via drill 0.35)
  Top 0.254: v27.56,74.68 v34.29,74.68 | v52.32,74.93 51.63,74.93 R22.2 | JP10.1 67.31,71.37 65.28,73.41 55.12,73.41 v54.61,73.89
  Bottom 0.254: U$1.PC11 21.21,72.39 23.5,74.68 v27.56,74.68 | v34.29,74.68 34.42,74.55 35.18,74.55 35.43,74.3 49.91,74.3 50.55,74.93 v52.32,74.93 52.58,74.93 52.83,74.68 54.61,74.68 v54.61,73.89
E_MOSI  (via drill 0.35)
  Top 0.254: v71.63,47.24 71.37,46.99 61.98,46.99 61.72,47.24 v61.72,49.23
  Bottom 0.254: JP9.2 59.31,69.47 59.31,50.16 60.25,49.23 v61.72,49.23 | 71.63,43.31 SJ15.2 | 71.63,43.31 v71.63,47.24 | SJ16.P$2 73.03,43.31 71.63,43.31
GND  (via drill 0.35)
  Top 0.254: Q1.2 56.83,12.95 v56.9,12.95 | Q3.2 61.91,13.21 v61.98,13.21 | 66.93,12.11 Q5.2 67.06,12.11 v67.06,13.21 | Q7.2 72.07,12.95 v71.87,12.95 | Q13.2 42.88,12.12 v42.88,13.01 | Q11.2 37.8,12.12 v37.8,13.01 | Q9.2 32.72,12.12 v32.72,13.01 | Q15.2 47.94,12.69 v47.92,13.02 | U$6.2 44.45,74.04 45.34,74.93 45.34,76.83 IC7.2 45.72,77.98 45.34,78.36 39.12,78.36 38.23,77.47 38.1,77.47 | C3.2 v35.81,76.96 36.7,77.85 37.72,77.85 38.1,77.47 | 38.1,77.47 C4.2 | R61.2 50.74,70.48 50.29,70.48 49.66,71.12 v49.66,71.25 | IC3.13 64.77,41.53 63.44,42.86 61.91,42.86 | IC5.13 63.5,27.94 63.5,33.27 60.96,35.81 v60.96,36.32 | R2.1 v38.1,42.8
  Top 0.406: C11.2 56.2,42.8 56.9,42.8 57.53,43.43 v57.91,43.43
  Top 0.508: v83.31,65.99 84.07,65.23 C10.2 | v62.48,43.43 61.91,42.86 C5.2
  Top 0.61: C2.- 97.79,66.55 95.76,64.52 95.76,61.48 AP1509.8 AP1509.7 AP1509.6 AP1509.5 | C7.2 33.65,31.75 IC6.11 31.5,31.5 v29.21,31.5 C6.2 | v15.62,8.64 v14.73,8.64 14.73,7.24 C9.2 17.53,6.86 JP12.6 JP12.5 21.34,6.6 22.48,5.46 25.9,5.46 X1.2 | JP11.6 JP11.5 | C8.2 JP7.5 JP7.6 8,77.34 v8,69.34 | U$1.GND5 U$1.GND3 v13.34,49.53 | v11.05,50.29 v8,50.29 | C1.2 89.89,78.39 v89.15,79.12 | v88.14,69.98 88.96,69.15 | 93.85,50.67 94.49,51.31 IC10.3 | X1.2 28.32,4.32 JP16.5 JP16.6 | X1.2 30.48,0.89 50.42,0.89 v51.44,1.91
  Top 0.813: J1.6 J1.7 | J1.3 91.31,44.2 91.06,44.45 91.06,47.37 91.83,47.37 J1.7 | J2.3 91.69,26.43 91.19,26.92 91.19,29.46 92.2,30.48 J2.7 J2.6 94.49,29.66 98.35,33.52 98.35,48.72 96.39,50.67 93.85,50.67 92.84,49.66 92.84,48.38 J1.7 | D1.A 88.24,57.63 AP1509.4 91.82,57.63 | 94.49,57.63 91.82,57.63 | 94.49,57.63 AP1509.5 95.72,56.99 IC10.4 | IC10.2 91.95,57.51 91.82,57.63 | IC10.3 94.49,57.63 | C10.2 88.96,69.15 89.15,69.34 90.93,69.34 v92.33,67.94
  Bottom 0.254: Q8.2 v71.87,12.95 71.61,13.21 67.69,13.21 67.69,12.17 Q6.2 67.63,13.21 v67.06,13.21 62.55,13.21 | 57.4,13.21 57.4,12.11 Q2.2 | 62.55,13.21 v61.98,13.21 60.96,13.21 57.4,13.21 | Q4.2 62.55,13.21 | v56.9,12.95 56.9,13.21 57.4,13.21 | Q16.2 v47.92,13.02 47.73,13.21 43.48,13.21 | Q10.2 33.34,12.61 33.93,13.21 | 42.88,13.21 43.48,13.21 | 42.88,13.21 38.41,13.21 | 37.8,13.21 33.93,13.21 | 37.8,13.21 38.41,13.21 | Q12.2 38.41,12.12 38.41,13.21 | Q14.2 43.48,12.12 43.48,13.21 | v42.88,13.01 42.88,13.21 | v32.72,13.01 32.72,13.21 33.93,13.21 | v37.8,13.01 37.8,13.21 | U$3.3 42.55,36.83 42.55,33.02 | 42.55,33.02 48.26,33.02 IC9.11 48.13,31.88 47.62,31.88 46.08,30.33 46.08,26.27 44.45,24.64 U$2.3 | 27.3,36.83 U$5.3 v29.84,34.92 29.84,33.66 31.56,31.94 | 31.56,31.94 IC6.11 32.26,31.75 33.02,30.99 35.69,30.99 37.72,33.02 42.55,33.02 | U$4.3 29.59,25.78 29.59,28.07 29.84,28.32 29.84,30.23 31.56,31.94 | v49.66,71.25 48.84,72.06 44.06,72.06 43.28,72.85 34.75,72.85 JP8.4 31.75,75.18 33.91,77.34 35.43,77.34 v35.81,76.96 | v60.96,36.32 61.32,35.97 64.26,35.97 64.26,37.59 IC3.13 | v38.1,42.8 38.48,43.18 39.5,43.18 | SJ3.2 76.12,2.41
  Bottom 0.406: v57.91,43.43 62.36,43.43 62.48,43.56
  Bottom 0.508: U$1.GND7 78.74,62.97 80.01,64.24 80.01,65.53 | 80.01,65.53 80.52,66.04 83.26,66.04 v83.31,65.99 | JP10.4 76.2,71.12 79.76,71.12 80.01,70.87 80.01,65.53 | IC4.8 66.8,47.75 66.67,47.75 65.15,46.24 65.15,46.23 63.18,44.26 | 63.18,44.26 62.48,43.56 v62.48,43.43 | IC3.8 84.09,30.48 88.15,26.43 | IC5.13 v67.31,24.13 67.94,23.5 74.93,23.5 75.56,22.86 | 75.56,22.86 77.34,22.86 77.98,23.5 80.64,23.5 81.28,22.86 81.28,22.1 80.9,21.72 SJ6.P$2 | 75.56,22.86 75.56,19.68 IC5.8 74.93,17.65 74.17,16.89 72.64,16.89 72.39,16.64 72.39,13.46 v71.87,12.95 | 61.85,5.46 62.23,5.84 62.23,8.38 60.96,9.65 60.96,13.21 | v32.72,13.01 29.13,13.01 JP16.6 27.05,10.92 25.02,10.92 24.51,11.43 24.51,12.95 v23.88,13.59 23.62,13.84 20.83,13.84 17.34,10.35 | U$2.3 43.18,25.4 33.78,25.4 33.66,25.27 33.66,22.86 30.86,20.07 SJ12.P$2 30.83,19.68 30.79,19.71 30.74,19.69 30.69,19.7 30.68,19.68 17.27,19.68 15.49,17.91 15.49,12.19 17.34,10.35 | 17.34,10.35 v15.62,8.64 | U$1.GND6 20.7,64.39 21.72,64.39 22.35,63.75 22.35,62.61 22.73,62.23 v26.04,62.23 29.59,62.23 29.59,62.95 29.69,63.05 29.69,67.03 30.1,67.44 30.1,68.2 JP8.4 | IC4.6 69.6,53.34 70.23,52.7 70.23,46.99 68.45,45.21 67.31,45.21 67.06,44.96 67.06,42.8 64.26,42.8 63.18,43.88 63.18,44.26 | SJ9.2 52.35,2.56 52.09,2.56
  Bottom 0.61: JP11.5 11.94,7.75 12.83,8.64 v14.73,8.64 v15.62,8.64 | v13.34,49.53 12.57,50.29 v11.05,50.29 | 8,61.59 v8,69.34 | 8,61.59 v8,50.29 8,40.01 | JP11.6 8,8 v8,17.53 8,18.8 | 8,40.01 8,18.8 | JP15.5 8,18.8 | JP14.5 8.13,40.13 8,40.01 | 8,61.59 8.13,61.47 JP13.5 10.67,62.74 10.67,67.56 15.49,72.39 15.49,73.41 18.41,76.33 25.27,76.33 25.91,76.96 29.46,76.96 30.23,76.2 30.23,74.17 31.75,72.64 JP8.4 | v89.15,79.12 89.15,74.55 88.14,73.53 v88.14,69.98 | U$1.GND8 81.41,49.66 84.58,49.66 86.49,51.56 D1.A | SJ6.P$2 80.01,21.21 83.06,18.16 | 83.06,18.16 83.06,16.08 J3.1 | SJ9.2 52.96,3.17 54.1,3.17 54.48,3.56 54.48,4.45 55.5,5.46 61.85,5.46 74.17,5.46 74.98,4.65 74.98,3.56 76.12,2.41 76.15,2.41 | 83.06,18.16 83.06,21.34 88.15,26.43 J2.3 | 52.09,2.56 v51.44,1.91 | IC1.6 38.61,52.58 37.72,52.58 37.47,52.32 37.47,49.91 39.12,48.26 IC1.8 39.5,48.13 39.5,43.18 39.75,42.93 42.04,42.93 42.55,42.42 42.55,36.83
  Bottom 0.813: v92.33,67.94 v95.12,67.94 97.16,67.94 C2.-
  pour Bottom: 0,80 100,80 100,0 0,0
  pour Top: 0,80 100,80 100,0 0,0
I2CSCL  (via drill 0.35)
  Top 0.254: JP8.2 26.67,71.63 20.57,77.72 R63.2 | v26.29,65.02 26.42,64.9 31.24,64.9 31.37,64.77 v31.88,64.77 | v31.37,49.53 36.58,49.53 37.21,50.16 37.21,51.52 38.02,52.32 40.77,52.32 41.4,52.96 41.4,53.42 41.53,53.55 v41.53,53.98 | v50.93,54.61 51.05,54.74 61.47,54.74 61.77,54.44 61.77,52.66 61.98,52.45 v61.98,52.07 | v69.22,51.69 71.63,49.28 77.34,49.28 77.47,49.4 77.47,50.04 78.74,51.31 U$1.PB6
  Bottom 0.254: JP8.2 26.67,67.06 26.29,66.67 v26.29,65.02 | v31.88,64.77 31.37,64.26 v31.37,49.53 | v41.53,53.98 41.66,54.1 43.43,54.1 43.69,54.36 48.72,54.36 48.98,54.61 v50.93,54.61 | v61.98,52.07 68.71,52.07 69.09,51.69 v69.22,51.69
I2CSDA  (via drill 0.35)
  Top 0.254: U$1.PB7 17.4,46.99 16.89,47.5 v15.62,47.5 | v16.13,66.8 16.13,67.56 17.14,68.58 21.46,68.58 22.73,69.85 JP8.1 24.13,73.41 21.59,75.95 R62.2
  Bottom 0.254: v15.62,47.5 15.62,47.75 16.51,48.64 16.51,56.26 15.49,57.28 15.49,66.17 v16.13,66.8
ILAT  (via drill 0.35)
  Top 0.254: v68.71,62.36 68.58,62.48 v49.91,62.48 | v71.88,64.64 73.03,63.5 IC4.15 75.95,63.5 77.47,61.98 77.47,61.72 78.23,60.96 79.25,60.96 80.01,60.2 80.01,58.42 U$1.PA6
  Bottom 0.254: IC1.15 48.01,62.48 v49.91,62.48 | v68.71,62.36 69.6,62.36 v71.88,64.64
LPOWA
  Bottom 0.254: SJ9.1 52.6,5.56 52.07,5.56
  Bottom 0.508: SJ8.P$1 54.23,10.29 52.07,8.13 IC8.9 52.07,5.71 SJ9.1 | SJ7.P$1 44.82,6.35 45.61,5.56 52.07,5.56
LPOWB
  Bottom 0.508: SJ10.P$1 27.94,14.73 28.83,13.84 29.59,13.84 30.35,14.61 30.35,16.51 30.86,17.02 | IC8.10 50.29,17.02 40.64,17.02 | 40.64,17.02 30.86,17.02 | SJ11.P$1 40.64,17.02 | SJ12.P$1 30.86,17.02
MISO  (via drill 0.35)
  Top 0.254: v60.45,75.06 61.21,75.82 64.52,75.82 65.02,75.31 67.77,75.31 70.44,72.64 74.68,72.64 76.83,70.48 v76.83,69.09 | v77.34,60.71 77.09,60.45 77.09,51.31 v77.34,51.05
  Bottom 0.254: JP9.1 57.15,70.99 60.45,74.17 v60.45,75.06 | v76.83,69.09 76.83,68.28 77.22,67.9 77.22,60.83 v77.34,60.71 | v77.34,51.05 77.34,49.53 77.09,49.28 77.09,47.5 75.69,46.1 75.69,44.96 76.71,43.94 76.71,43.56 77.47,42.8 77.47,41.15 78.74,39.88 U$1.PB4
MISO2  (via drill 0.35)
  Top 0.254: U$1.PC2 13.84,29.21 v13.46,29.59 | v10.92,29.59 v7.11,29.59 | v65.66,56.9 59.69,56.9 59.18,57.4 51.18,57.4 v50.93,57.15 | v47.88,57.15 v45.62,57.15 | v7.11,51.82 7.62,51.82 11.05,55.24 16.13,55.24 16.76,55.88 21.21,55.88 21.72,55.37 21.72,54.99 22.35,54.36 26.92,54.36 27.3,54.74 33.53,54.74 33.78,54.99 33.78,56.9 34.04,57.15 v39.5,57.15
  Bottom 0.254: v13.46,29.59 v10.92,29.59 | v7.11,29.59 v7.11,51.82 | IC4.13 74.04,58.42 72.14,56.52 | v65.66,56.9 68.45,56.9 68.83,56.52 72.14,56.52 | v50.93,57.15 v47.88,57.15 | v45.62,57.15 v39.5,57.15 | SJ13.P$2 72.14,56.52
MISO2_ALT  (via drill 0.35)
  Top 0.254: U$1.PB14 80.01,40.64 77.6,40.64 76.76,41.48 v76.76,41.96
  Bottom 0.254: v76.76,41.96 75.77,41.96 75.69,42.04 75.69,42.16 75.31,42.55 75.31,43.86 74.68,44.49 74.68,46.35 72.14,48.9 SJ13.P$1
MOSI  (via drill 0.35)
  Top 0.254: R20.1 v73.66,36.2 73.66,34.04 75.95,31.75 75.95,25.4 75.31,24.77 75.31,22.23 74.14,22.23 74.14,22.22 74.1,22.22 74.06,22.2 74.02,22.18 74,22.15 73.97,22.14 73.95,22.13 73.91,22.14 73.86,22.13 73.82,22.12 73.79,22.09 73.78,22.09 SJ17.P$2 71.75,21.97 v71.37,22.35 | v63.88,23.62 62.23,25.27 IC5.14
  Bottom 0.254: U$1.PB5 78.74,36.2 v73.66,36.2 73.66,39.24 72.64,40.26 69.98,40.26 SJ15.1 | v71.37,22.35 65.15,22.35 v63.88,23.62
N$1  (via drill 0.35)
  Top 0.254: IC2.1 R3.1 56.81,8.55 57.78,9.53 57.78,13.34 56.9,14.1 56.9,16.64 56.13,17.4 56.13,20.17 v57,21.03
  Bottom 0.254: v57,21.03 59.69,23.72 IC5.15
N$2
  Top 0.254: JP1.1 55.88,5 54.74,6.15 54.74,9.02 55.12,9.4 56.74,9.4 57.1,9.75 57.1,10.77 56.79,11.07 55.98,11.07 55.88,11.18 IC2.18 Q1.3
N$3
  Top 0.254: IC5.1 57.15,17.17 57.4,16.92 57.4,14.61 58.29,13.72 58.29,7.75 IC2.2
  Bottom 0.254: R4.1 IC2.2
N$4  (via drill 0.35)
  Top 0.813: J1.4 95.87,45.23 96.22,44.88 96.22,35.48 96.14,35.41 v96.14,34.92
  Bottom 0.813: J2.4 95.14,27.45 96.14,28.45 v96.14,34.92
N$5
  Bottom 0.813: J1.5 92.32,46.22 91.19,45.09 91.19,41.66 92.58,40.26 92.58,32.77 91.19,31.37 91.19,29.21 91.96,28.43 J2.5
N$6  (via drill 0.35)
  Top 0.254: JP3.8 7.37,52.58 11.18,56.39 JP13.10 13.21,57.66 v16.26,57.66 | RN5.2 RN4.8 28.83,49.15 30.82,49.15 R60.2 R36.2
  Bottom 0.254: RN5.2 24.13,48.51 22.48,50.16 22.48,54.27 21.97,54.78 21.97,57.53 21.08,58.42 16.89,58.42 16.26,57.78 v16.26,57.66
N$7
  Top 0.254: IC2.17 Q2.3 58.8,13.93 58.8,8.89 59.44,8.26 59.44,6.1 58.42,5.08 JP1.2 58.8,3.35
  Bottom 0.254: Q2.3 IC2.17
N$8
  Top 0.254: IC5.2 59.69,18.03 59.77,17.96 61.35,16.43 61.98,15.81 61.98,14.48 62.87,13.59 62.87,11.3 62.48,10.92 62.48,9.19 61.84,8.55 R5.1 IC2.3
N$9
  Top 0.254: IC2.16 Q3.3 60.96,11.08 61.82,11.08 61.98,10.92 61.98,9.4 60.07,9.4 59.94,9.27 59.94,6.1 60.96,5.08 JP1.3
N$10
  Top 0.254: IC5.3 62.23,16.27 62.48,16.02 62.48,14.69 63.37,13.8 63.37,8.51 63.5,8.38 IC2.4
  Bottom 0.254: R6.1 IC2.4
N$11
  Top 0.254: IC2.15 63.5,14.39 63.88,14.01 63.88,8.76 64.52,8.13 64.52,5.84 63.5,4.83 JP1.4
  Bottom 0.254: Q4.3 IC2.15
N$12
  Top 0.254: IC5.4 64.9,18.92 64.9,17.27 65.66,16.51 66.67,16.51 67.06,16.13 67.06,14.35 67.94,13.46 67.94,11.05 67.56,10.67 67.56,9.14 66.97,8.55 R7.1 IC2.5
N$13
  Top 0.254: IC2.14 Q5.3 66.04,11.18 66.14,11.07 66.9,11.07 67.06,10.92 67.06,9.65 66.8,9.4 65.15,9.4 65.02,9.27 65.02,5.84 66.04,4.83 JP1.5
N$14  (via drill 0.35)
  Top 0.254: JP3.7 7.24,55.12 8.51,56.39 JP13.9 10.67,57.66 12.45,57.66 13.21,58.42 21.08,58.42 21.97,57.53 21.97,57.15 22.48,56.64 22.48,55.24 22.86,54.86 25.53,54.86 v25.78,55.12 | R37.2 R59.2 31.49,50.8 30.64,51.66 28.8,51.66 RN4.7 RN5.3 25.78,52.45 v25.78,52.58
  Bottom 0.254: v25.78,55.12 v25.78,52.58
N$15  (via drill 0.35)
  Top 0.254: JP3.6 9.91,57.66 11.18,58.93 JP13.8 12.32,59.31 v16.26,59.31 | RN5.4 RN4.6 28.83,54.23 30.82,54.23 R58.2 R38.2
  Bottom 0.254: RN5.4 22.48,54.99 22.48,59.05 21.72,59.82 21.72,60.33 21.08,60.96 17.02,60.96 16.26,60.2 v16.26,59.31
N$16
  Bottom 0.254: R6.2 64.45,11.2 Q4.1
N$17
  Top 0.254: IC5.5 67.31,16.59 67.56,16.34 67.56,14.56 68.45,13.67 68.45,7.75 IC2.6
  Bottom 0.254: IC2.6 R8.1
N$18
  Top 0.254: IC2.13 68.58,14.26 68.96,13.88 68.96,9.02 69.6,8.38 69.6,5.59 68.58,4.57 JP1.6
  Bottom 0.254: Q6.3 IC2.13
N$19  (via drill 0.35)
  Top 0.254: JP3.4 9.91,62.74 11.18,64.01 JP13.4 13.08,62.87 v16.26,62.87 | RN5.6 RN4.4 28.83,59.31 30.82,59.31 R56.2 R41.2
  Bottom 0.254: RN5.6 22.35,60.2 22.35,60.58 21.59,61.34 21.59,62.87 20.95,63.5 16.51,63.5 16.26,63.25 v16.26,62.87
N$20
  Top 0.254: JP3.3 7.11,65.28 8.38,64.01 JP13.3 10.16,64.01 11.43,65.28 12.45,65.28 14.22,63.5 21.59,63.5 RN5.7 RN4.3 28.83,61.85 30.82,61.85 R55.2 R42.2
N$21  (via drill 0.35)
  Top 0.254: JP2.6 9.91,36.32 11.18,37.59 JP14.8 13.04,37.59 14.86,39.41 14.86,40.51 v16.26,41.91 | RN2.4 RN1.6 56.77,54.23 58.76,54.23 R50.1 R30.2 | v21.72,42.55 22.35,43.18 26.03,43.18 27.55,44.7 40.89,44.7 41.27,44.32 42.04,44.32 v42.55,44.83 | v43.31,52.32 43.31,50.67 42.67,50.04 42.67,48.13 v42.55,48.01
  Bottom 0.254: RN2.4 49.66,53.34 48.64,52.32 v43.31,52.32 | v21.72,42.55 21.08,43.18 17.14,43.18 16.26,42.29 v16.26,41.91 | v42.55,48.01 v42.55,44.83
N$22
  Top 0.254: R44.2 R53.2 30.82,66.93 28.83,66.93 RN4.1 RN5.9 13.72,66.04 13.21,66.55 13.21,67.06 12.32,67.94 10.79,67.94 JP13.1 5.59,70.36 JP3.1
N$23
  Top 0.254: IC1.2 42.04,60.83 42.04,54.61 42.17,54.48 42.29,54.35 42.29,53.59 41.91,53.21 41.91,51.82 38.23,51.82 37.72,51.31 37.72,49.4 36.58,48.26 RN4.9 R36.1
N$24
  Top 0.254: IC1.3 41.02,60.96 41.53,60.45 41.53,55.03 40.85,54.36 38.1,54.36 37.47,53.72 37.47,52.7 RN4.10 R37.1
N$25  (via drill 0.35)
  Top 0.254: JP2.8 7.37,31.24 11.18,35.05 JP14.10 v16.26,39.37 | v22.23,40.77 22.35,40.89 29.08,40.89 29.59,41.4 29.59,42.55 30.73,43.69 40.3,43.69 40.68,43.31 43.05,43.31 44.96,45.21 49.02,45.21 RN2.2 RN1.8 56.77,49.15 58.76,49.15 R52.1 R28.2
  Bottom 0.254: v22.23,40.77 22.1,40.64 17.14,40.64 16.38,39.88 16.38,39.5 v16.26,39.37
N$26  (via drill 0.35)
  Top 0.254: JP2.7 7.37,33.78 8.64,35.05 JP14.9 10.03,35.05 11.3,36.32 12.49,36.32 15.37,39.2 15.37,39.5 16.51,40.64 21.08,40.64 23.11,42.67 26.24,42.67 27.77,44.2 40.51,44.2 40.89,43.81 42.55,43.81 v43.43,44.7 | RN2.3 RN1.7 56.77,51.69 58.76,51.69 R51.1 R29.2 | v43.43,49.78 v43.43,48.01
  Bottom 0.254: RN2.3 50.16,50.8 49.15,49.78 v43.43,49.78 | v43.43,48.01 v43.43,44.7
N$27
  Top 0.254: R7.2 65.09,11.2 Q5.1
N$28  (via drill 0.35)
  Top 0.254: JP2.5 7.37,38.86 8.64,37.59 JP14.7 10.67,38.86 13.59,38.86 14.35,39.62 14.35,41.02 16.51,43.18 20.95,43.18 21.46,43.69 25.82,43.69 27.34,45.21 41.4,45.21 41.6,45.01 v41.66,45.01 | RN2.5 RN1.5 56.77,56.77 58.76,56.77 R49.1 R31.2 | v42.8,54.86 42.8,53.38 42.42,53 42.42,52.07 42.67,51.82 42.67,50.93 41.66,49.91 v41.66,48.01
  Bottom 0.254: RN2.5 49.53,55.88 48.51,54.86 v42.8,54.86 | v41.66,48.01 v41.66,45.01
N$29
  Top 0.254: IC1.4 41.02,56.77 41.02,55.24 40.64,54.86 37.34,54.86 35.81,53.34 RN4.11 R38.1
N$30
  Top 0.254: IC1.5 RN4.12 R39.1
N$31  (via drill 0.35)
  Top 0.254: v40.9,59.23 40.9,59.31 40.77,59.44 38.1,59.44 37.08,58.42 RN4.13 R41.1 | v42.8,59.05 43.81,58.04 43.81,53.59 46.61,50.8 IC1.10
  Bottom 0.254: v40.9,59.23 42.62,59.23 v42.8,59.05
N$32  (via drill 0.35)
  Top 0.254: v40.89,60.07 40.77,59.94 38.1,59.94 37.08,60.96 RN4.14 R42.1 | v42.8,60.07 43.43,60.07 44.45,59.05 44.45,55.88 IC1.11
  Bottom 0.254: v40.89,60.07 v42.8,60.07
N$33  (via drill 0.35)
  Top 0.254: JP2.4 9.91,41.4 11.18,42.67 JP14.4 12.7,43.43 15.58,43.43 15.96,43.81 v16.38,43.81 | v21.84,44.83 21.89,44.79 22.18,44.79 22.78,44.2 25.61,44.2 27.13,45.72 48.76,45.72 50.16,47.12 50.16,58.17 50.42,58.42 RN2.6 RN1.4 56.77,59.31 58.76,59.31 R48.1 R32.2
  Bottom 0.254: v21.84,44.83 21.84,45.09 21.21,45.72 17.14,45.72 16.38,44.96 v16.38,43.81
N$34
  Top 0.254: JP2.3 7.24,43.94 8.51,42.67 JP14.3 9.53,42.67 10.79,43.94 15.37,43.94 17.14,45.72 21.97,45.72 22.99,44.7 25.4,44.7 26.92,46.23 48.55,46.23 49.66,47.33 49.66,60.71 49.91,60.96 RN2.7 RN1.3 56.77,61.85 58.76,61.85 R47.1 R33.2
N$35  (via drill 0.35)
  Top 0.254: v16.26,46.74 13.59,46.74 12.06,45.21 JP14.2 11.18,45.21 9.91,43.94 8.38,43.94 5.84,46.48 JP2.2 | v21.84,46.48 22.1,46.74 48.34,46.74 49.15,47.54 49.15,62.87 49.78,63.5 RN2.8 RN1.2 56.77,64.39 58.76,64.39 R46.1 R34.2
  Bottom 0.254: v16.26,46.74 16.38,46.74 16.51,46.86 16.51,47.62 17.14,48.26 20.83,48.26 21.59,47.5 21.59,46.74 v21.84,46.48
N$36
  Top 0.254: R35.2 R45.2 58.63,65.02 56.9,65.02 RN1.1 RN2.9 49.66,66.04 48.64,65.02 48.64,47.75 48.13,47.24 22.73,47.24 21.72,48.26 12.83,48.26 9.78,45.21 JP14.1 5.59,49.02 JP2.1
N$37
  Top 0.254: R43.1 RN4.15 36.7,63.5 37.72,64.52 41.4,64.52 44.96,60.96 44.96,56.39 45.47,55.88 IC1.12
N$38
  Top 0.254: IC1.14 45.97,60.96 41.91,65.02 37.97,65.02 36.96,66.04 RN4.16 R44.1
N$39
  Top 0.254: IC5.6 69.85,17.02 70.36,16.51 71.75,16.51 72.14,16.13 72.14,14.35 73.03,13.46 73.03,11.05 72.64,10.67 72.64,9.31 71.88,8.55 R9.1 IC2.7
N$40
  Top 0.254: JP1.7 71.12,4.57 70.1,5.59 70.1,9.14 70.36,9.4 72.01,9.4 72.14,9.53 72.14,10.97 72.03,11.07 71.22,11.07 71.12,11.18 Q7.3 IC2.12
N$41
  Top 0.254: IC5.7 72.39,16.59 72.64,16.34 72.64,14.56 73.53,13.67 73.53,7.75 IC2.8
  Bottom 0.254: IC2.8 R10.1
N$42
  Top 0.254: IC2.11 73.66,14.26 74.04,13.88 74.04,9.14 74.68,8.51 74.68,5.46 73.66,4.45 JP1.8
  Bottom 0.254: Q8.3 IC2.11
N$43
  Bottom 0.254: R8.2 69.53,11.2 Q6.1
N$44  (via drill 0.35)
  Top 0.254: IC4.2 68.83,63.5 69.6,62.74 v69.6,61.47 | v69.98,58.04 69.98,53.59 68.45,52.07 65.79,52.07 65.41,51.69 65.41,50.42 63.5,48.51 RN1.9 R28.1
  Bottom 0.254: v69.6,61.47 69.6,59.19 69.85,58.94 69.85,58.93 69.98,58.8 v69.98,58.04
N$45
  Top 0.813: JP4.1 86.87,2.54 D2.C
N$46
  Top 0.813: JP4.4 84.33,10.16 D2.A
N$47  (via drill 0.35)
  Top 0.254: v69.22,58.67 69.22,57.23 69.47,56.98 69.47,55.16 68.66,54.36 65.79,54.36 65.53,54.1 65.53,53.09 63.5,51.05 RN1.10 R29.1
  Bottom 0.254: IC4.3 68.96,60.96 69.09,60.83 69.09,58.8 v69.22,58.67
N$48
  Top 0.254: IC4.4 68.96,56.77 68.96,55.37 68.45,54.86 65.28,54.86 63.75,53.34 RN1.11 R30.1
N$49
  Top 0.254: IC4.5 RN1.12 R31.1
N$50
  Top 0.254: IC4.10 73.91,50.8 72.26,52.45 72.26,58.84 71.67,59.44 64.52,59.44 RN1.13 R32.1
N$51
  Top 0.254: IC4.11 74.17,53.34 72.77,54.74 72.77,59.05 71.88,59.94 64.52,59.94 RN1.14 R33.1
N$52
  Top 0.254: IC4.12 74.68,55.88 73.28,57.28 73.28,61.51 70.28,64.52 64.52,64.52 RN1.15 R34.1
N$53
  Top 0.254: IC4.14 74.55,60.96 70.48,65.02 64.52,65.02 RN1.16 R35.1
N$54  (via drill 0.35)
  other vias: 5.21,58.8
N$55  (via drill 0.35)
  other vias: 5.21,56.64
N$56  (via drill 0.35)
  Top 0.254: IC3.15 55.47,33.88 v55.47,22.76 | v51.31,18.39 51.21,18.24 40.97,18.24 40.01,17.27 38.19,17.27 37.68,16.76 35.76,16.76 35.2,16.2 33.33,16.2 33.02,15.9 33.02,13.92 33.73,13.21 33.73,9.75 32.53,8.55 R11.1 IC8.1
  Bottom 0.254: v55.47,22.76 55.47,19.41 54.65,18.59 51.56,18.59 v51.31,18.39
N$57
  Top 0.813: JP4.3 88.27,0.89 82.25,0.89 R40.2
N$58  (via drill 0.35)
  other vias: 5.08,53.85
N$59  (via drill 0.35)
  other vias: 8.26,54.74
N$60
  Bottom 0.508: SJ14.P$1 23.24,42.55
  Bottom 0.61: U$1.VIN2 20.83,43.94 21.84,43.94 23.24,42.55 23.36,42.55
N$61  (via drill 0.35)
  other vias: 10.67,53.59
N$62  (via drill 0.35)
  other vias: 15.49,54.36
N$63  (via drill 0.35)
  other vias: 14.86,56.13
N$64  (via drill 0.35)
  other vias: 5.08,61.59
N$65
  Top 0.254: R9.2 70.17,11.2 Q7.1
N$66  (via drill 0.35)
  other vias: 14.48,61.47
N$67  (via drill 0.35)
  other vias: 15.11,67.56
N$68  (via drill 0.35)
  other vias: 9.14,68.33
N$69  (via drill 0.35)
  other vias: 4.95,68.96
N$70  (via drill 0.35)
  other vias: 4.95,66.67
N$71  (via drill 0.35)
  other vias: 5.08,64.14
N$72  (via drill 0.35)
  other vias: 1.78,47.75
N$73  (via drill 0.35)
  other vias: 1.78,45.21
N$74  (via drill 0.35)
  other vias: 1.78,42.67
N$75
  Top 0.254: IC8.11 48.87,14.58 48.87,10.87 48.56,10.57 48.56,9.54 48.26,9.24 48.26,6.2 49.53,4.93 JP6.8
  Bottom 0.254: Q16.3 IC8.11
N$76  (via drill 0.35)
  other vias: 1.78,40.13
N$77  (via drill 0.35)
  other vias: 1.78,37.59
N$78
  Top 0.254: R3.2 54.93,11.2 Q1.1
N$79
  Bottom 0.254: R4.2 59.37,11.2 Q2.1
N$80  (via drill 0.35)
  other vias: 1.91,35.05
N$81  (via drill 0.35)
  other vias: 1.78,32.51
N$82  (via drill 0.35)
  other vias: 2.03,29.46
N$83
  Top 0.254: JP3.5 7.37,60.2 8.64,58.93 JP13.7 10.29,58.93 11.43,60.07 16,60.07 16.89,60.96 21.59,60.96 22.48,60.07 22.48,57.53 RN5.5 RN4.5 28.83,56.77 30.82,56.77 R57.2 R39.2
N$84  (via drill 0.35)
  Top 0.254: RN5.8 RN4.2 28.83,64.39 30.82,64.39 R54.2 R43.2 | v16.26,65.28 13.21,65.28 JP13.2 11.43,66.55 10.16,65.28 8.64,65.28 6.1,67.82 JP3.2
  Bottom 0.254: RN5.8 21.59,66.04 17.02,66.04 v16.26,65.28
N$85
  Bottom 0.254: R10.2 74.61,11.2 Q8.1
N$86  (via drill 0.35)
  other vias: 3.81,29.46
N$87
  Top 0.254: IC8.18 Q9.3 31.75,11.23 31.9,11.07 32.56,11.07 32.82,10.82 32.82,9.65 32.56,9.4 30.89,9.4 30.58,9.09 30.58,5.79 31.75,4.62 JP6.1
N$88
  Top 0.254: R5.2 60.01,11.2 Q3.1
N$89  (via drill 0.35)
  Top 0.254: IC3.1 56.19,29.52 v56.19,23.47 56.19,23.28 | v52.02,17.88 51.87,17.73 41.18,17.73 40.22,16.76 38.4,16.76 37.89,16.26 35.97,16.26 35.56,15.85 35.56,13.72 34.85,13.01 34.85,8.18 IC8.2
  Bottom 0.254: v56.19,23.47 56.19,19.41 54.66,17.88 v52.02,17.88 | IC8.2 R12.1
N$90  (via drill 0.35)
  other vias: 1.91,26.42
N$91
  Top 0.254: IC8.17 34.29,9.5 33.02,8.23 33.02,5.79 34.29,4.52 JP6.2
  Bottom 0.254: Q10.3 IC8.17
N$92  (via drill 0.35)
  Top 0.254: IC3.2 59.69,29.49 58.17,27.96 58.17,24.54 55.01,21.38 v54.87,21.38 | v54.36,19.25 54.36,19.22 52.36,17.22 41.4,17.22 40.43,16.26 38.61,16.26 38.3,15.95 38.3,13.51 38.81,13.01 38.81,9.86 37.5,8.55 R13.1 IC8.3
  Bottom 0.254: v54.36,19.25 54.97,19.86 54.97,21.34 54.91,21.34 v54.87,21.38
N$93
  Top 0.254: IC8.16 Q11.3 36.83,11.12 36.88,11.07 37.59,11.07 37.8,10.87 37.8,9.65 37.54,9.4 36.02,9.4 35.56,8.94 35.56,5.79 36.83,4.52 JP6.3
N$94
  Top 0.254: IC3.3 60.1,28.35 59.27,28.35 58.67,27.75 58.67,24.33 55.12,20.78 55.12,18.19 54.04,18.19 52.57,16.71 41.6,16.71 40.64,15.75 40.64,14.02 40.03,13.41 40.03,8.28 IC8.4
  Bottom 0.254: IC8.4 R14.1
N$95
  Top 0.254: IC8.15 39.37,9.5 38.1,8.23 38.1,5.79 39.37,4.52 JP6.4
  Bottom 0.254: Q12.3 IC8.15
N$96
  Top 0.254: IC3.4 65.79,29.46 65.79,24.29 64.15,22.66 57.81,22.66 56.79,21.64 56.75,21.64 55.63,20.52 55.63,17.68 54.25,17.68 52.78,16.2 43.84,16.2 43.18,15.54 43.18,13.72 43.79,13.11 43.79,9.85 42.83,8.89 42.25,8.89 R15.1 IC8.5
N$97
  Top 0.254: IC8.14 Q13.3 41.91,11.23 42.06,11.07 42.77,11.07 42.88,10.97 42.88,9.65 42.62,9.4 41.15,9.4 40.89,9.14 40.89,5.74 41.91,4.72 JP6.5
N$98  (via drill 0.35)
  Top 0.254: IC3.5 66.29,29.46 66.29,24.08 64.36,22.15 60.71,22.15 60.35,21.79 v60.35,21.74 | v53.75,16.15 53.75,13.71 v53.84,13.61
  Bottom 0.254: v60.35,21.74 60.05,21.74 58.67,20.42 58.67,17.83 58.12,17.27 54.86,17.27 v53.75,16.15 | v53.84,13.61 53.84,11.28 50.8,8.23 50.8,7.21 49.78,6.2 45.87,6.2 IC8.6 R16.1
N$99
  Top 0.254: IC8.13 44.45,9.5 43.18,8.23 43.18,5.69 44.45,4.42 JP6.6
  Bottom 0.254: Q14.3 IC8.13
N$100  (via drill 0.35)
  Top 0.254: IC3.6 70.87,29.46 70.87,23.98 68.53,21.64 62.23,21.64 62.03,21.44 v61.57,21.44 | R17.1 IC8.7